# Altium PCB ModemWithRPi.PcbDoc
Units mm, origin at the board's own origin, x right, y up, seen from the top; angles counter-clockwise.
Board outline 80 x 120 mm, 2 copper layers (Top Layer, Bottom Layer), stack 0.325 mm thick; 21 components, 17 nets, 144 pads, 0 vias.
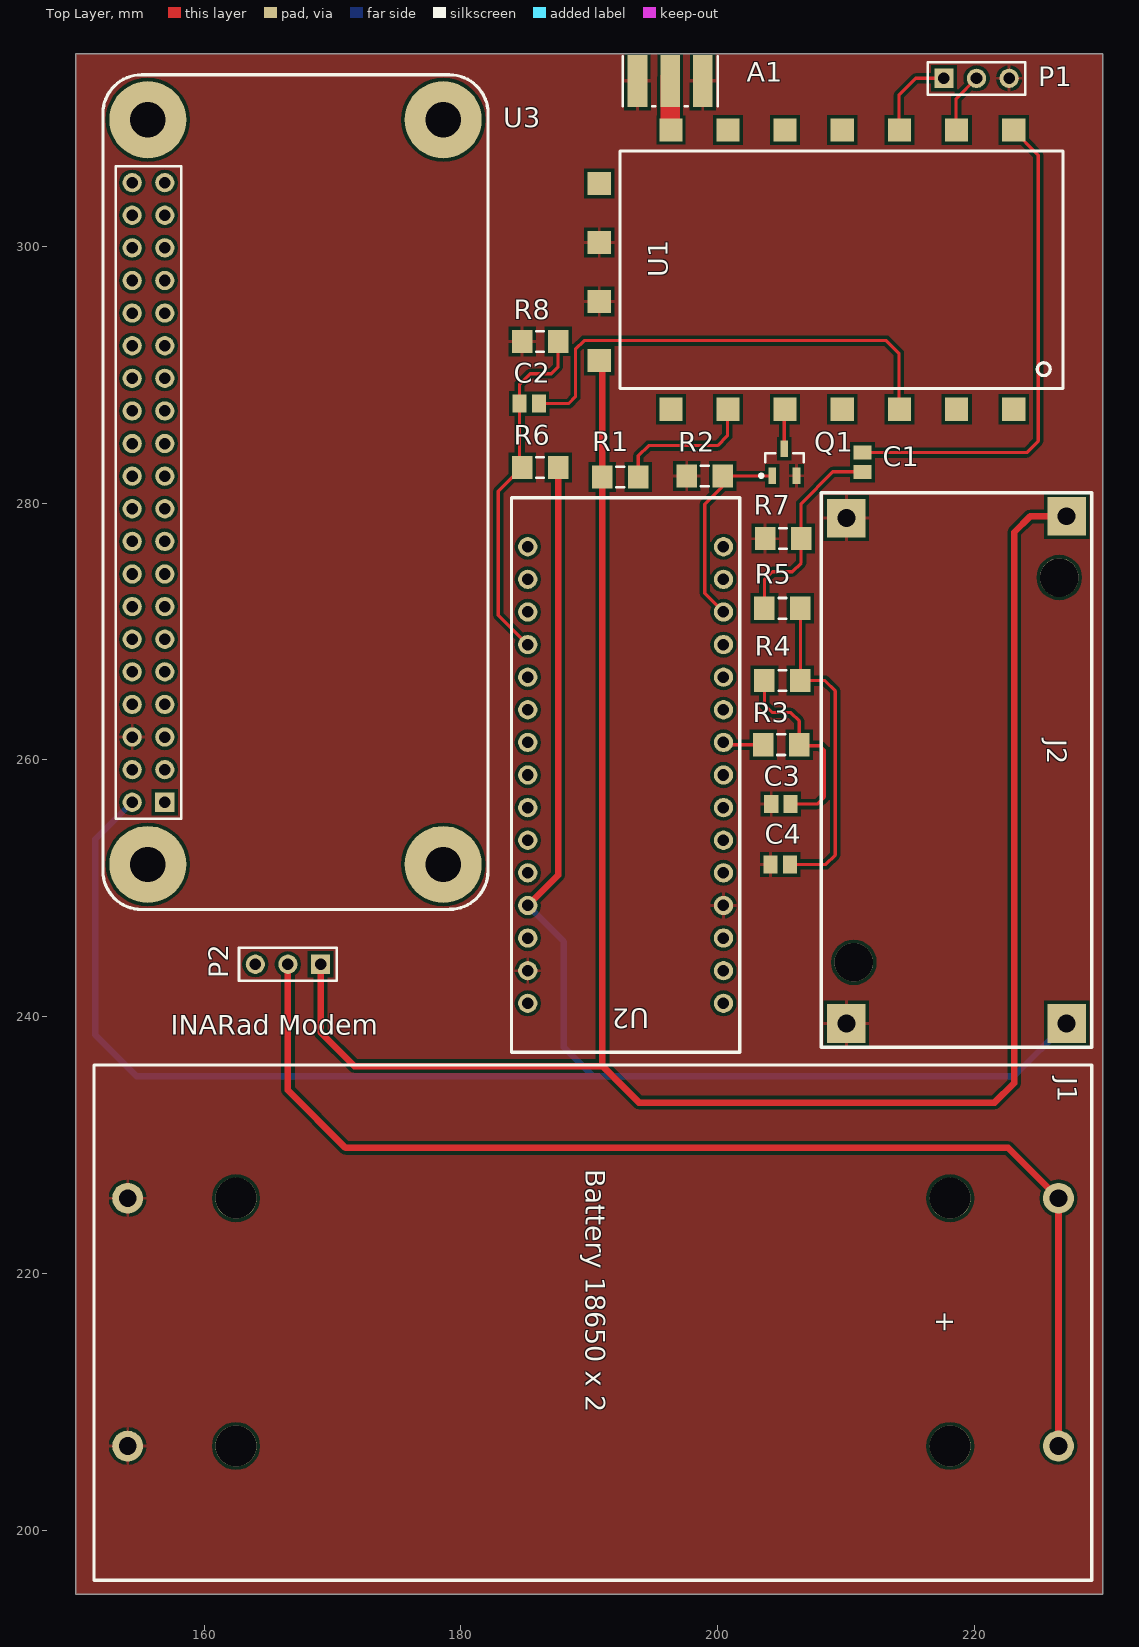
[diagram p0: Top Layer view]
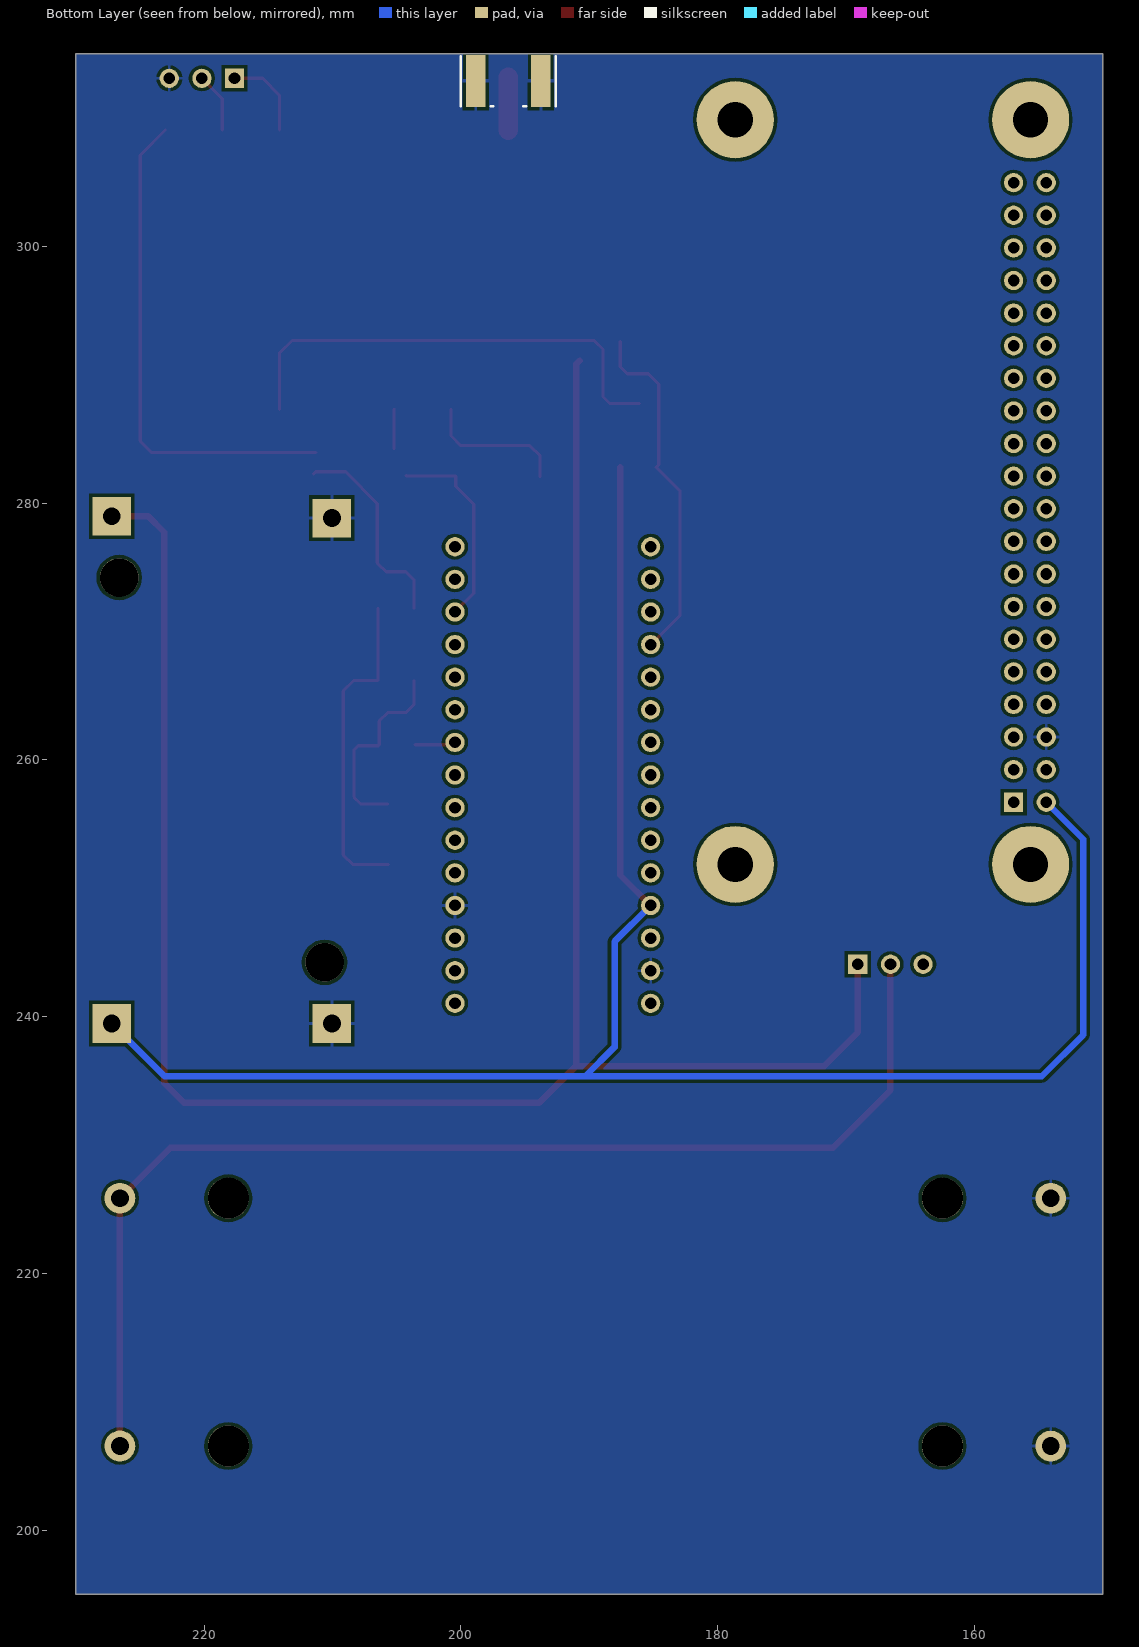
[diagram p1: Bottom Layer view, seen from below]

## Layer stack, top to bottom
Top Solder: solder mask 0.0102, Solder Resist, Dk 3.5
Top Layer: signal copper 0.0356
Dielectric 1: dielectric 0.254, FR-4, Dk 4.2
Bottom Layer: signal copper 0.0356
Bottom Solder: solder mask 0.0102, Solder Resist, Dk 3.5

## Board outline
150,195 230,195 230,315 150,315

## Design rules (kind name [scope] priority, off if disabled: settings)
Clearance [All] p1: gap=0.254
PolygonConnect [All] p1: connectstyle=Relief reliefconductorwidth=0.254 reliefentries=4 polygonreliefangle="90 Angle" airgapwidth=0.254
RoutingVias [All] p1: holewidth=0.711 width=1.27 viastyle="Through Hole" minholewidth=0.711 minwidth=1.27 maxholewidth=0.711 maxwidth=1.27
SolderMaskExpansion [All] p1: expansion=0.102
Width [All] p1: maxlimit=1.524 minlimit=0.254 preferedwidth=0.254 minimp=50.000000 maximp=50.000000 favimp=50.000000
30 further rules are at their usual default settings.

## Components (designator, comment, footprint, x,y, rotation, side; value= is the part's Value field where it differs from the comment)
A1 "Basic Antenna" CON-SMA-EDGE062 196.3,312.875 r90 top
C1 "Cap Pol3" C0805 211.3,283.175 r90 top
C2 "Cap Pol3" C0805 185.325,287.75 r180 top
C3 "Cap Pol3" C0805 204.925,256.55 r180 top
C4 "Cap Pol3" C0805 204.875,251.85 r180 top
J1 "BatteryHolder18650" BatteryHolder18650 229.15,196.1 r180 top
J2 "CN6009" CN6009 229.15,280.8 r270 top
P1 "Header 3" HDR1X3 217.625,313.075 r0 top
P2 "Header 3" HDR1X3 169.075,244.075 r180 top
Q1 "2N7002" SOT23_N 205.2,283.175 r90 top
R1 "ERJP08D" 8-1206 192.425,282.025 r180 top
R2 "ERJP08D" 8-1206 199,282.1 r0 top
R3 "ERJP08D" 8-1206 204.95,261.175 r180 top
R4 "ERJP08D" 8-1206 205.05,266.175 r180 top
R5 "ERJP08D" 8-1206 205.05,271.8 r180 top
R6 "ERJP08D" 8-1206 186.175,282.775 r0 top
R7 "ERJP08D" 8-1206 205.1,277.225 r180 top
R8 "ERJP08D" 8-1206 186.175,292.575 r0 top
U1 "SA818" SA818 191.9,288.425 r90 top
U2 "Arduino Nano" Nano 201.725,237.225 r180 top
U3 "Raspberry Pi Zero W" PCBComponent_1 152.125,248.35 r90 top

## Footprints (in the part's own frame and the unit in brackets; to place one, negate y for a bottom-side part, rotate by r counter-clockwise, add the part's x,y. Pads: shape width x height; smd on the part's side, far side on the other; paste and mask are expansions set on the pad)
8-1206 [mm] "Chip Resistor; Body 3.1 x 1.6 mm (LxW typ)"
  rect 1.6x1.8 smd: 1(-1.4,0) 2(1.4,0)
  silkscreen extent -0.3,-0.8 0.3,0.8
BatteryHolder18650 [mm]
  round 2.4 hole 1.38: 1(2.6,-10.455) 2(75.1,-10.45) 3(2.6,-29.755) 4(75.1,-29.755)
  round 3.2 hole 3.2 unplated mask+1: ""(11.04,-10.455) ""(11.04,-29.755) ""(66.66,-29.755) ""(66.66,-10.455)
  silkscreen extent 0,-40.13 77.72,0
C0805 [mm] "Chip Capacitor, Body 2.0x1.3mm, IPC High Density"
  rect 1.1x1.4 smd: 1(-0.75,0) 2(0.75,0)
  body extent -1.1,-0.72 1.1,0.72, height 1.4
CN6009 [mm]
  rect 3x3 hole 1.38: 1(1.841,-1.968) 2(1.968,-19.113) 3(41.338,-1.968) 4(41.338,-19.113)
  round 3 hole 3 mask+0.5: ""(6.604,-2.54) ""(36.576,-18.54)
  silkscreen extent 0,-21.08 43.18,0
CON-SMA-EDGE062 [mil] "Connector, SMA Female Edge Mount for 0.062\" Thick Board, 5-Lead, Body Dia. 7.9mm"
  rect 160x60 smd: G(0,100) G(0,-100) S(0,0)
  rect 160x60 smd far side: G(0,100) G(0,-100)
  silkscreen extent -77,-146 76,146, body extent -77,-163 387,163, height 187
HDR1X3 [mm] "Connector; Header; 3 Position"
  rect 1.5x1.5 hole 0.9: 1(0,0)
  round 1.5 hole 0.9: 2(2.54,0) 3(5.08,0)
  silkscreen extent -1.27,-1.27 6.35,1.27
Nano [mm]
  round 1.5 hole 0.9: 1(1.27,-3.81) 2(1.27,-6.35) 3(1.27,-8.89) 4(1.27,-11.43) 5(1.27,-13.97) 6(1.27,-16.51) 7(1.27,-19.05) 8(1.27,-21.59) 9(1.27,-24.13) 10(1.27,-26.67) 11(1.27,-29.21) 12(1.27,-31.75) 13(1.27,-34.29) 14(1.27,-36.83) 15(1.27,-39.37) 16(16.51,-39.37) 17(16.51,-36.83) 18(16.51,-34.29) 19(16.51,-31.75) 20(16.51,-29.21) 21(16.51,-26.67) 22(16.51,-24.13) 23(16.51,-21.59) 24(16.51,-19.05) 25(16.51,-16.51) 26(16.51,-13.97) 27(16.51,-11.43) 28(16.51,-8.89) 29(16.51,-6.35) 30(16.51,-3.81)
  silkscreen extent 0,-43.18 17.78,0
PCBComponent_1 [mm]
  rect 1.5x1.5 hole 0.9: 1(8.342,-4.82)
  round 1.5 hole 0.9: 2(8.342,-2.28) 3(10.882,-4.82) 4(10.882,-2.28) 5(13.422,-4.82) 6(13.422,-2.28) 7(15.962,-4.82) 8(15.962,-2.28) 9(18.502,-4.82) 10(18.502,-2.28) 11(21.042,-4.82) 12(21.042,-2.28) 13(23.582,-4.82) 14(23.582,-2.28) 15(26.122,-4.82) 16(26.122,-2.28) 17(28.662,-4.82) 18(28.662,-2.28) 19(31.202,-4.82) 20(31.202,-2.28) 21(33.742,-4.82) 22(33.742,-2.28) 23(36.282,-4.82) 24(36.282,-2.28) 25(38.822,-4.82) 26(38.822,-2.28) 27(41.362,-4.82) 28(41.362,-2.28) 29(43.902,-4.82) 30(43.902,-2.28) 31(46.442,-4.82) 32(46.442,-2.28) 33(48.982,-4.82) 34(48.982,-2.28) 35(51.522,-4.82) 36(51.522,-2.28) 37(54.062,-4.82) 38(54.062,-2.28) 39(56.602,-4.82) 40(56.602,-2.28)
  round 6 hole 2.75 unplated: ""(3.5,-3.5) ""(3.5,-26.5) ""(61.5,-26.5) ""(61.5,-3.5)
  silkscreen extent 0,-30 65,0
SA818 [mm]
  rect 1.8x1.8 smd: 1(-1.12,-31.166) 2(-1.12,-26.721) 3(-1.12,-22.276) 4(-1.12,-17.805) 5(-1.12,-13.36) 6(-1.12,-8.915) 7(-1.12,-4.47) 8(2.667,1.12) 9(7.264,1.12) 10(11.862,1.12) 11(16.459,1.12) 12(20.627,-4.47) 13(20.627,-8.915) 14(20.627,-13.36) 15(20.627,-17.805) 16(20.627,-22.276) 17(20.627,-26.721) 18(20.627,-31.166)
  silkscreen extent 0.5,-35 19,-0.5
SOT23_N [mm] "SOT23, 3-Leads, Body 2.9x1.3mm, Pitch 0.95mm, Lead Span 2.3mm, IPC Medium Density"
  rect 1.3x0.6 smd: 1(-1.05,0.95) 2(-1.05,-0.95) 3(1.05,0)
  silkscreen extent -1.17,-1.5 0.7,1.92, body extent -0.7,-1.5 0.7,1.5, height 1.1

## Part data
C1 C2 C3 C4: "Polarized Capacitor (Surface Mount)"
P1 P2: "Header, 3-Pin"
Q1: "N-channel Enhancement Mode Field-effect Transistor"
R1 R2 R3 R4 R5 R6 R7 R8: "Anti-Surge Thick Film Chip Resistor, 10 Ohm to 1M Ohm Range, 0.5% Tolerance, 1206 Size, 0.25 W"
U2: library part Component_1

## Nets (pads, with @x,y where several pads share a name; then routed paths per layer and width w, separated by ;. In a path a pad name is that pad's centre, name@x,y a point inside that pad or via, vN(x,y) a via of type N, cw(c..) or ccw(c..) an arc to the next point about the centre after c; other vN are vias at no path point)
+5: J2.3 R6.2 U2.27 U3.2 | length 148.5
  Top Layer w0.508: U2.27 187.575,251.015 R6.2
  Bottom Layer w0.508: U3.2 151.525,253.812 151.525,238.575 154.75,235.35 190.3,235.35 ; U2.27 188.025,245.845 188.025,237.625 190.3,235.35 ; J2.3 223.07,235.35 190.3,235.35
GND: A1.G C3.2 C4.2 J1.2 J1.4 J2.2 J2.4 P1.3 Q1.2 R2.1 R7.2 R8.1 U1.9 U1.10 U2.4 U2.29 U3.6
NetA1_S: A1.S U1.12 | length 4.1
  Top Layer w1.524: U1.12@196.295,309.027 A1.S@196.295,313.17
NetC1_1: C1.1 R5.2 R7.1 | length 16.3
  Top Layer w0.254: R5.2 203.65,274.025 204.275,274.65 205.825,274.65 206.5,275.325 R7.1 206.5,279.95 208.975,282.425 C1.1 C1.1@211.45,282.275
NetC1_2: C1.2 U1.18 | length 39.1
  Top Layer w0.254: C1.2 224.075,283.925 224.975,284.825 224.975,307.093 U1.18@223.016,309.052
NetC2_1: C2.1 U1.3 | length 37
  Top Layer w0.254: C2.1 188.4,287.75 188.925,288.275 188.925,291.975 189.6,292.65 213.15,292.65 214.126,291.674 U1.3@214.126,287.305
NetC2_2: C2.2 R6.1 R8.2 U2.19 | length 27.6
  Top Layer w0.254: U2.19 182.925,271.265 182.925,280.925 R6.1 184.575,282.975 C2.2 184.575,289.25 185.4,290.075 187.05,290.075 187.575,290.6 R8.2
NetC3_1: C3.1 R3.1 R4.2 | length 15.6
  Top Layer w0.254: R4.2 203.65,264.3 204.275,263.675 205.7,263.675 206.35,263.025 R3.1 206.425,261.1 207.975,261.1 208.325,260.75 208.325,257.1 207.775,256.55 C3.1
NetC4_1: C4.1 R4.1 R5.1 | length 25.3
  Top Layer w0.254: C4.1 208.425,251.85 209.158,252.583 209.158,265.367 208.35,266.175 R4.1 R5.1
NetP1_1: P1.1 U1.16 | length 6.8
  Top Layer w0.254: U1.16@214.126,309.052 214.126,311.776 215.425,313.075 P1.1
NetP1_2: P1.2 U1.17 | length 4.7
  Top Layer w0.254: U1.17@218.571,309.052 218.571,311.481 P1.2
NetQ1_1: Q1.1 R2.2 U2.13 | length 15.6
  Top Layer w0.254: U2.13 199,272.97 199,279.9 200.4,281.3 R2.2 204.225,282.1 Q1.1
NetQ1_3: Q1.3 U1.5 | length 3.1
  Top Layer w0.254: Q1.3 205.2,287.295 U1.5@205.21,287.305
NetR1_1: R1.1 U1.6 | length 11.3
  Top Layer w0.254: R1.1 193.825,283.675 194.625,284.475 200,284.475 200.765,285.24 U1.6@200.765,287.305
NetR3_2: R3.2 U2.9 | length 3.2
  Top Layer w0.254: U2.9 200.635,261.175 R3.2
VBAT: J1.1 J1.3 P2.2 | length 92.6
  Top Layer w0.508: P2.2 166.535,234.265 171.025,229.775 222.63,229.775 J1.3 J1.1
VCC: J2.1 P2.1 R1.2 U1.8 | length 164.8
  Top Layer w0.508: P2.1 169.075,238.775 171.7,236.15 191.025,236.15 ; U1.8@190.73,291.092 191.025,290.797 R1.2 191.025,236.15 ; J2.1 224.334,278.959 223.1,277.725 223.1,234.8 223.075,234.8 221.575,233.3 193.875,233.3 191.025,236.15
pads on no net: J1. J2. P2.3 U1.1 U1.2 U1.4 U1.7 U1.11 U1.13 U1.14 U1.15 U2.1 U2.2 U2.3 U2.5 U2.6 U2.7 U2.8 U2.10 U2.11 U2.12 U2.14 U2.15 U2.16 U2.17 U2.18 U2.20 U2.21 U2.22 U2.23 U2.24 U2.25 U2.26 U2.28 U2.30 U3. U3.1 U3.3 U3.4 U3.5 U3.7 U3.8 U3.9 U3.10 U3.11 U3.12 U3.13 U3.14 U3.15 U3.16 U3.17 U3.18 U3.19 U3.20 U3.21 U3.22 U3.23 U3.24 U3.25 U3.26 U3.27 U3.28 U3.29 U3.30 U3.31 U3.32 U3.33 U3.34 U3.35 U3.36 U3.37 U3.38 U3.39 U3.40

## Polygon pours and split planes (outlines as drawn)
GND on Top Layer "GND" (solid, pour order 0): 150,315 230,315 230,195 150,195
GND on Bottom Layer "GND" (solid, pour order 2): 150,315 230,315 230,195 150,195 150,315

## Silkscreen, mask and mechanical layers (free items; w line width, h text height)
Top Overlay:
  text "INARad Modem" at 157.4,238.575 h1.52

## Text inside footprints (layer, text, board x,y; h text height)
J1: Top Overlay "Battery 18650 x 2" at 189.729,228.104 h1.52 r270; Top Overlay "+" at 217.034,217.08 h1.52 r270